# Altium PCB STM32F407VET6 开发板.PcbDoc
Units mil, origin at the board's own origin, x right, y up, seen from the top; angles counter-clockwise.
Board outline 2697.53 x 3244.54 mil, 2 copper layers (Top Layer, Bottom Layer); 9 components, 0 nets, 120 pads, 0 vias.
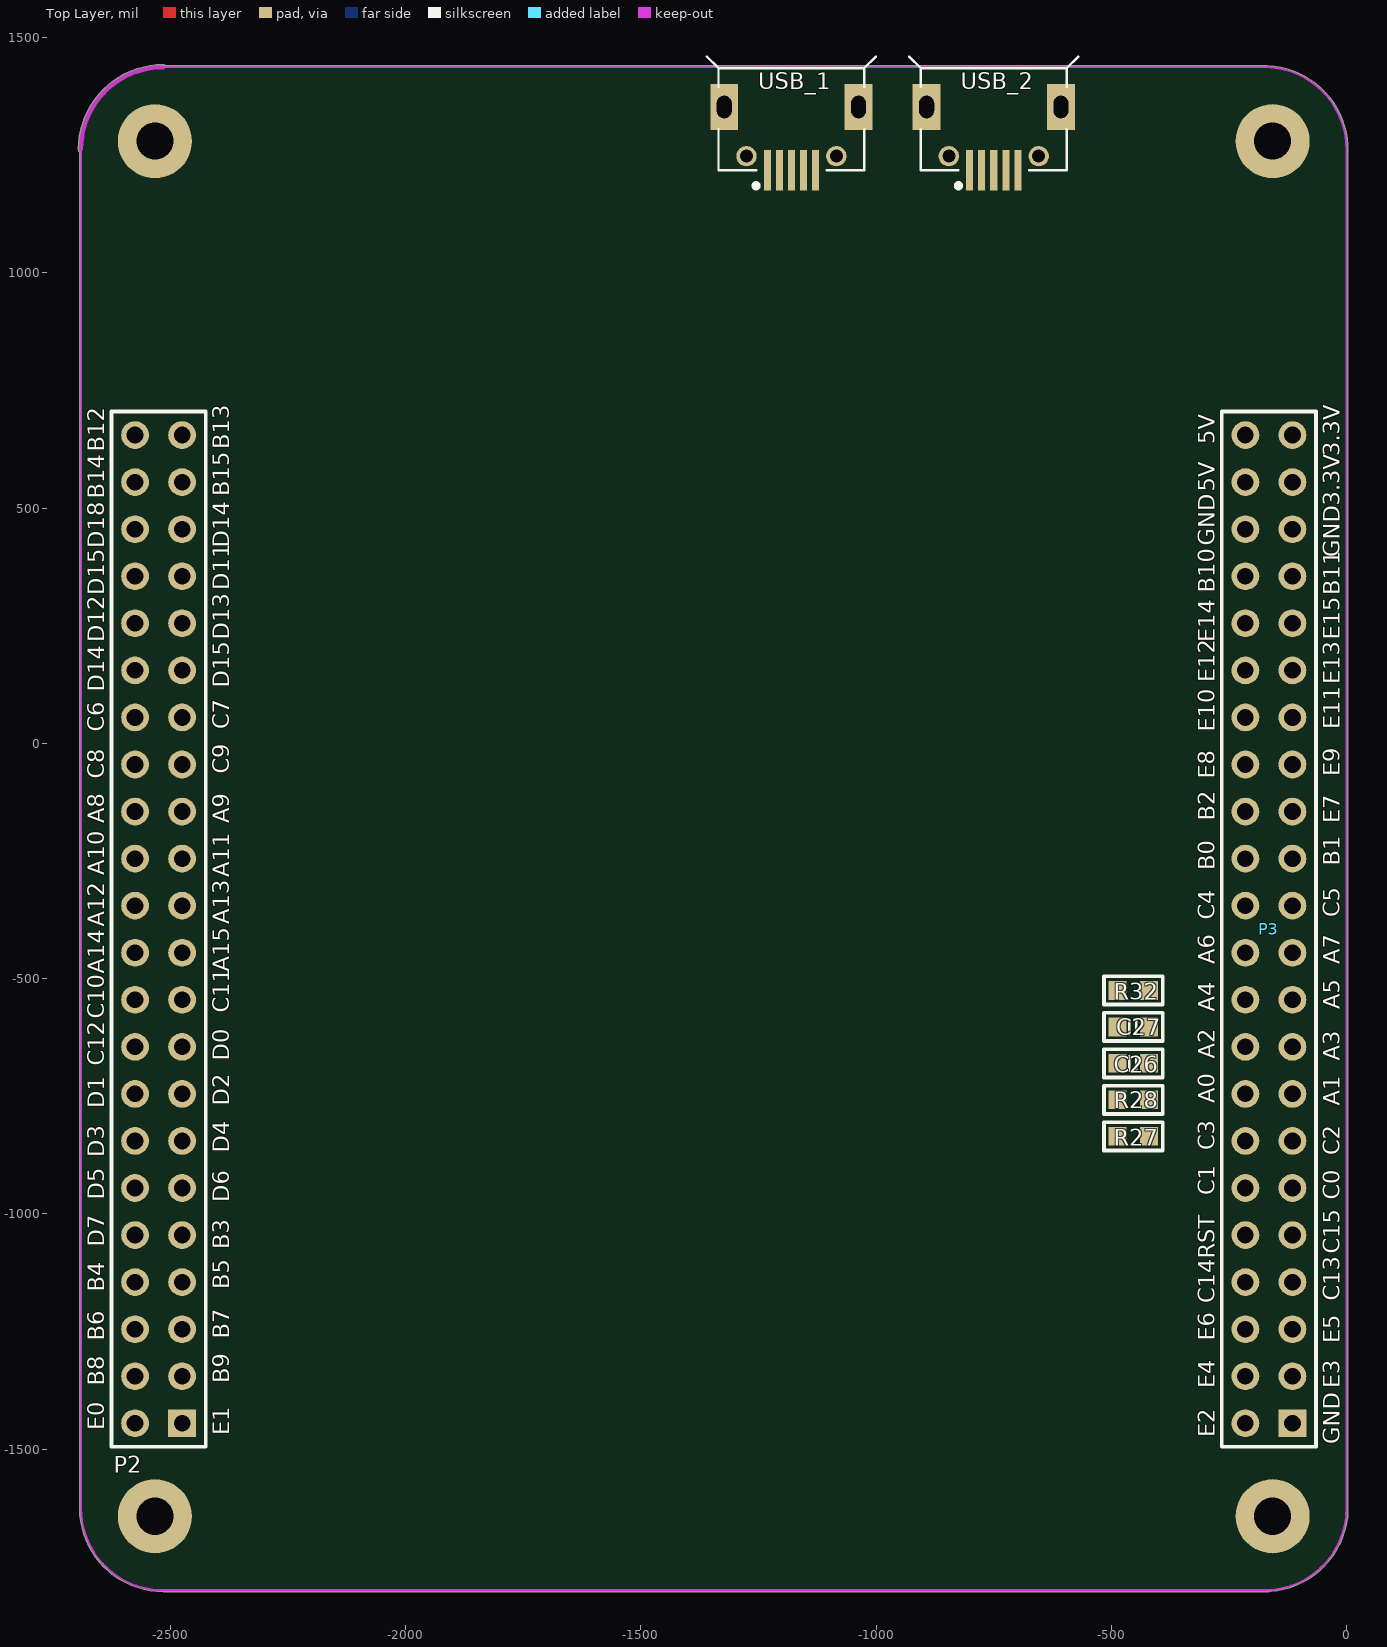
[diagram p0: Top Layer view]
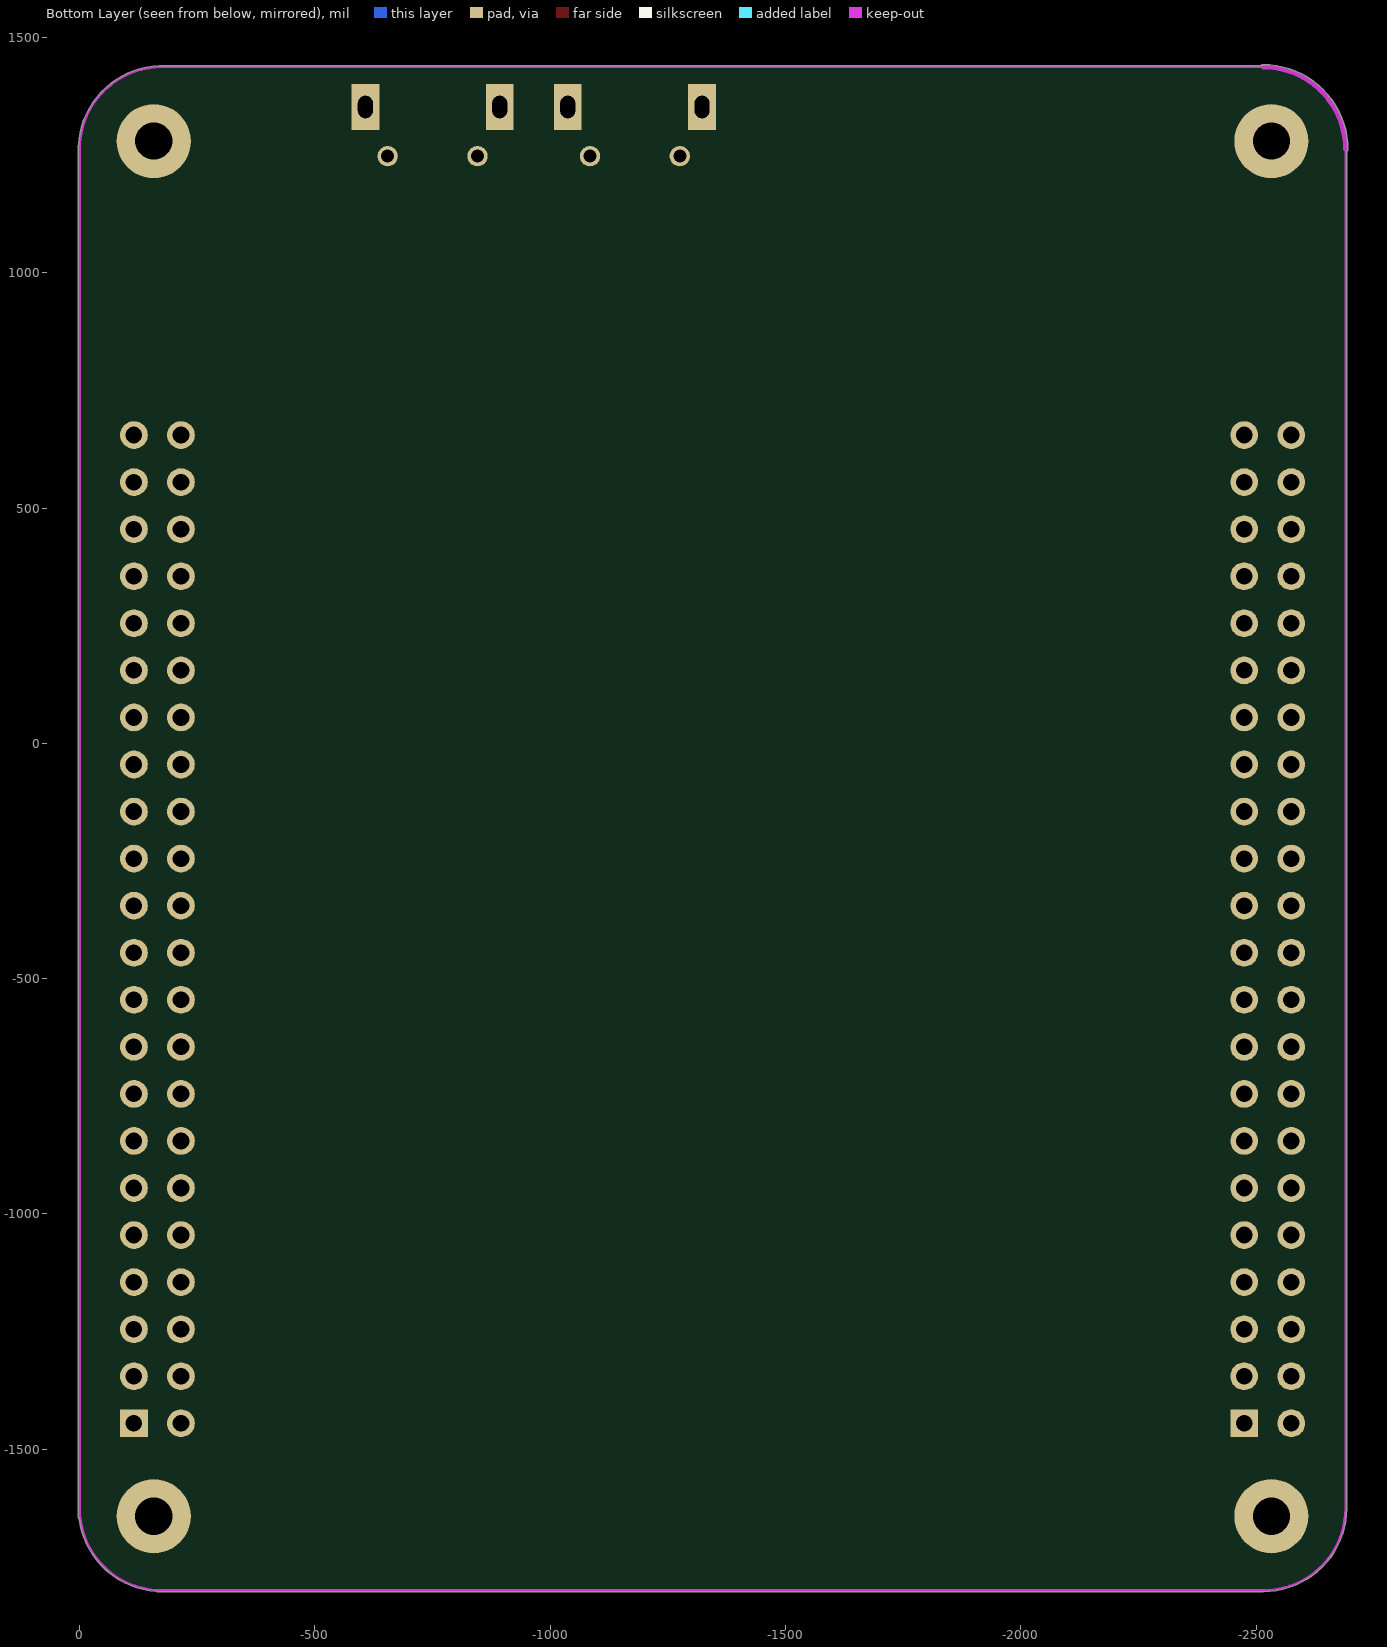
[diagram p1: Bottom Layer view, seen from below]

## Layer stack, top to bottom
Top Layer: signal copper 1.4
Dielectric: dielectric 12.6, FR-4, Dk 4.8
Bottom Layer: signal copper 1.4

## Board outline
-2692.44,-1625.6 cw(c-2690,-1625) -2692.52,-1625 -2692.52,1257.74 cw(c-2690,1262.08) -2695.02,1262.08 cw(c-2515.07,1262.08) -2515,1442.02 cw(c-2515,1437.01) -2510.66,1439.52 -170,1439.52 cw(c-170,1437.01) -169.33,1439.43 cw(c-175,1262.08) 2.21,1271.2 cw(c0,1270) 2.51,1270 2.51,-1645 cw(c0,-1645) 1.12,-1647.25 cw(c-174.93,-1625.07) -163.71,-1802.16 cw(c-165,-1800) -165,-1802.51 -2515,-1802.51 cw(c-2515,-1625.07)

## Design rules (kind name [scope] priority, off if disabled: settings)
Clearance [All] p1: gap=8
PlaneConnect [All] p1: planeconnectstyle=Direct reliefexpansion=20 reliefentries=4 reliefconductorwidth=10 reliefairgap=10
PolygonConnect [All] p1: connectstyle=Direct reliefconductorwidth=10 reliefentries=4 polygonreliefangle="90 Angle"
RoutingVias [All] p1: holewidth=28 width=50 viastyle="Through Hole" minholewidth=15 minwidth=15 maxholewidth=28 maxwidth=50
SolderMaskExpansion [All] p1: expansion=4
TestPointUsage [All] p1: valid=0 allowmultiple=FALSE
Testpoint [All] p1: side=15 testpointundercomponent=TRUE minsize=40 maxsize=100 preferedsize=60 minholesize=0 maxholesize=40 preferedholesize=32 testpointgrid=1 style=1023 order=0123456789
Width [All] p1: maxlimit=70 minlimit=8 preferedwidth=10
18 further rules are at their usual default settings.

## Components (designator, comment, footprint, x,y, rotation, side; value= is the part's Value field where it differs from the comment)
C26 "Cap" 0603C -487,-680 r0 top
C27 "Cap" 0603C -487,-602.5 r0 top
P2 "Header 22X2" HDR2X22 -2524.65,-395 r90 top
P3 "Header 22X2" HDR2X22 -165.35,-395 r90 top
R27 "Res2" 0603R -487,-835 r0 top
R28 "Res2" 0603R -487,-757.5 r0 top
R32 "Res2" 0603R -487,-525 r0 top
USB_1 "USB" MICRO_USB -1180,1435 r90 top
USB_2 "USB" MICRO_USB -750,1435 r90 top

## Footprints (in the part's own frame and the unit in brackets; to place one, negate y for a bottom-side part, rotate by r counter-clockwise, add the part's x,y. Pads: shape width x height; smd on the part's side, far side on the other; paste and mask are expansions set on the pad)
0603C [mil]
  rect 38x40 smd: 1(0,0) 2(67,0)
  silkscreen extent -29,-30 96,30
0603R [mil]
  rect 38x40 smd: 1(0,0) 2(67,0)
  silkscreen extent -29,-30 96,30
HDR2X22 [mm] "Connector; Header; 22x2 Position"
  rect 1.5x1.5 hole 0.9: 1(-26.67,-1.27)
  round 1.5 hole 0.9: 2(-26.67,1.27) 3(-24.13,-1.27) 4(-24.13,1.27) 5(-21.59,-1.27) 6(-21.59,1.27) 7(-19.05,-1.27) 8(-19.05,1.27) 9(-16.51,-1.27) 10(-16.51,1.27) 11(-13.97,-1.27) 12(-13.97,1.27) 13(-11.43,-1.27) 14(-11.43,1.27) 15(-8.89,-1.27) 16(-8.89,1.27) 17(-6.35,-1.27) 18(-6.35,1.27) 19(-3.81,-1.27) 20(-3.81,1.27) 21(-1.27,-1.27) 22(-1.27,1.27) 23(1.27,-1.27) 24(1.27,1.27) 25(3.81,-1.27) 26(3.81,1.27) 27(6.35,-1.27) 28(6.35,1.27) 29(8.89,-1.27) 30(8.89,1.27) 31(11.43,-1.27) 32(11.43,1.27) 33(13.97,-1.27) 34(13.97,1.27) 35(16.51,-1.27) 36(16.51,1.27) 37(19.05,-1.27) 38(19.05,1.27) 39(21.59,-1.27) 40(21.59,1.27) 41(24.13,-1.27) 42(24.13,1.27) 43(26.67,-1.27) 44(26.67,1.27)
  silkscreen extent -27.94,-2.54 27.94,2.54
MICRO_USB [mm]
  round 1.1 hole 0.7: 0(-4.756,-2.425) 0(-4.756,2.425)
  rect 2.5x1.5 hole 0.8 slot 1.2 at 0 deg: 0(-2.106,3.625) 0(-2.106,-3.625)
  rect 2.184x0.381 smd: 1(-5.514,-1.3) 2(-5.514,-0.65) 3(-5.514,0) 4(-5.514,0.65) 5(-5.514,1.3)
  silkscreen extent -6.48,-4.57 0.62,4.57

## Part data
C26: "Capacitor"
C27: library part C
P2: library part HEAD2*27
P3: library part "Header 2X2", "Header, 2-Pin, Dual row"
R27 R28 R32: "Resistor"
USB_1 USB_2: library part USB5

## Free pads (board coordinates)
  round 157.48 hole 78.74: 0(-2532.52,-1642.52) 1(-157.48,-1642.52) 2(-2532.52,1279.53) 3(-157.48,1279.53)

## Nets (pads, with @x,y where several pads share a name; then routed paths per layer and width w, separated by ;. In a path a pad name is that pad's centre, name@x,y a point inside that pad or via, vN(x,y) a via of type N, cw(c..) or ccw(c..) an arc to the next point about the centre after c; other vN are vias at no path point)
pads on no net: C26.1 C26.2 C27.1 C27.2 P2.1 P2.2 P2.3 P2.4 P2.5 P2.6 P2.7 P2.8 P2.9 P2.10 P2.11 P2.12 P2.13 P2.14 P2.15 P2.16 P2.17 P2.18 P2.19 P2.20 P2.21 P2.22 P2.23 P2.24 P2.25 P2.26 P2.27 P2.28 P2.29 P2.30 P2.31 P2.32 P2.33 P2.34 P2.35 P2.36 P2.37 P2.38 P2.39 P2.40 P2.41 P2.42 P2.43 P2.44 P3.1 P3.2 P3.3 P3.4 P3.5 P3.6 P3.7 P3.8 P3.9 P3.10 P3.11 P3.12 P3.13 P3.14 P3.15 P3.16 P3.17 P3.18 P3.19 P3.20 P3.21 P3.22 P3.23 P3.24 P3.25 P3.26 P3.27 P3.28 P3.29 P3.30 P3.31 P3.32 P3.33 P3.34 P3.35 P3.36 P3.37 P3.38 P3.39 P3.40 P3.41 P3.42 P3.43 P3.44 R27.1 R27.2 R28.1 R28.2 R32.1 R32.2 USB_1.0 USB_1.1 USB_1.2 USB_1.3 USB_1.4 USB_1.5 USB_2.0 USB_2.1 USB_2.2 USB_2.3 USB_2.4 USB_2.5

## Keep-outs
Keep-Out Layer:
  lines w5: -2690,-1625 -2690,1272.01 ; -2689.93,-1625 ccw(c-2515,-1625.07) -2515,-1800 ; -2530,-1800 -165,-1800 ; -2520,1437.01 -170,1437.01 ; -175,-1800 ccw(c-174.93,-1625.07) 0,-1625.07 ; -175,1437.01 cw(c-175,1262.08) -0.07,1262.01 ; 0,-1635 0,1280
  lines w10: -2690,1262.08 cw(c-2515.07,1262.08) -2515,1437.01

## Silkscreen, mask and mechanical layers (free items; w line width, h text height)
Top Overlay:
  text "5V" at -280,635 h35 r90
  text "B13" at -2375,625 h35 r90
  text "B12" at -2640,620 h35 r90
  text "3.3V" at -15,610 h35 r90
  text "5V" at -280,535 h35 r90
  text "B15" at -2375,525 h35 r90
  text "B14" at -2640,520 h35 r90
  text "3.3V" at -15,505 h35 r90
  text "GND" at -280,420 h35 r90
  text "D14" at -2375,416 h35 r90
  text "D18" at -2640,415 h35 r90
  text "GND" at -15,395 h35 r90
  text "D11" at -2375,325 h35 r90
  text "B10" at -280,320 h35 r90
  text "D15" at -2640,315 h35 r90
  text "B11" at -15,315 h35 r90
  text "D13" at -2375,220 h35 r90
  text "E15" at -15,220 h35 r90
  text "D12" at -2640,215 h35 r90
  text "E14" at -280,215 h35 r90
  text "E12" at -280,130 h35 r90
  text "E13" at -15,125 h35 r90
  text "D15" at -2375,118.57 h35 r90
  text "D14" at -2640,110 h35 r90
  text "C7" at -2375,30 h35 r90
  text "E11" at -15,30 h35 r90
  text "C6" at -2640,25 h35 r90
  text "E10" at -280,25 h35 r90
  text "C9" at -2375,-65 h35 r90
  text "E9" at -15,-70 h35 r90
  text "C8" at -2640,-75 h35 r90
  text "E8" at -280,-75 h35 r90
  text "B2" at -280,-165 h35 r90
  text "A8" at -2640,-170 h35 r90
  text "A9" at -2375,-170 h35 r90
  text "E7" at -15,-170 h35 r90
  text "B1" at -15,-260 h35 r90
  text "B0" at -280,-270 h35 r90
  text "A10" at -2640,-280 h35 r90
  text "A11" at -2375,-285 h35 r90
  text "C5" at -15,-370 h35 r90
  text "C4" at -280,-375 h35 r90
  text "A13" at -2375,-385 h35 r90
  text "A12" at -2640,-390 h35 r90
  text "A6" at -280,-470 h35 r90
  text "A7" at -15,-470 h35 r90
  text "A15" at -2375,-485 h35 r90
  text "A14" at -2640,-490 h35 r90
  text "A5" at -15,-565 h35 r90
  text "A4" at -280,-570 h35 r90
  text "C11" at -2375,-573 h35 r90
  text "C10" at -2640,-585 h35 r90
  text "A2" at -280,-670 h35 r90
  text "D0" at -2375,-675 h35 r90
  text "A3" at -15,-675 h35 r90
  text "C12" at -2640,-685 h35 r90
  text "A0" at -280,-765 h35 r90
  text "D2" at -2375,-770 h35 r90
  text "A1" at -15,-770 h35 r90
  text "D1" at -2640,-775 h35 r90
  text "C3" at -280,-865 h35 r90
  text "D4" at -2375,-870 h35 r90
  text "C2" at -15,-875 h35 r90
  text "D3" at -2640,-880 h35 r90
  text "C1" at -280,-960 h35 r90
  text "D5" at -2640,-970 h35 r90
  text "C0" at -15,-970 h35 r90
  text "D6" at -2375,-975 h35 r90
  text "D7" at -2640,-1070 h35 r90
  text "B3" at -2375,-1075 h35 r90
  text "C15" at -15,-1085 h35 r90
  text "RST" at -280,-1095 h35 r90
  text "B5" at -2375,-1160 h35 r90
  text "B4" at -2640,-1165 h35 r90
  text "C13" at -15,-1185 h35 r90
  text "C14" at -280,-1190 h35 r90
  text "B7" at -2375,-1265 h35 r90
  text "B6" at -2640,-1270 h35 r90
  text "E6" at -280,-1270 h35 r90
  text "E5" at -15,-1275 h35 r90
  text "B9" at -2375,-1360 h35 r90
  text "B8" at -2640,-1365 h35 r90
  text "E4" at -280,-1370 h35 r90
  text "E3" at -15,-1370 h35 r90
  text "E0" at -2640,-1460 h35 r90
  text "E1" at -2375,-1470 h35 r90
  text "E2" at -280,-1475 h35 r90
  text "GND" at -15,-1490 h35 r90